# Altium PCB 48v-4v regulator.PcbDoc
Units mm, origin at the board's own origin, x right, y up, seen from the top; angles counter-clockwise.
Board outline 38.75 x 31.25 mm, 2 copper layers (Top Layer, Bottom Layer), stack 1.621 mm thick; 27 components, 13 nets, 69 pads, 87 vias.
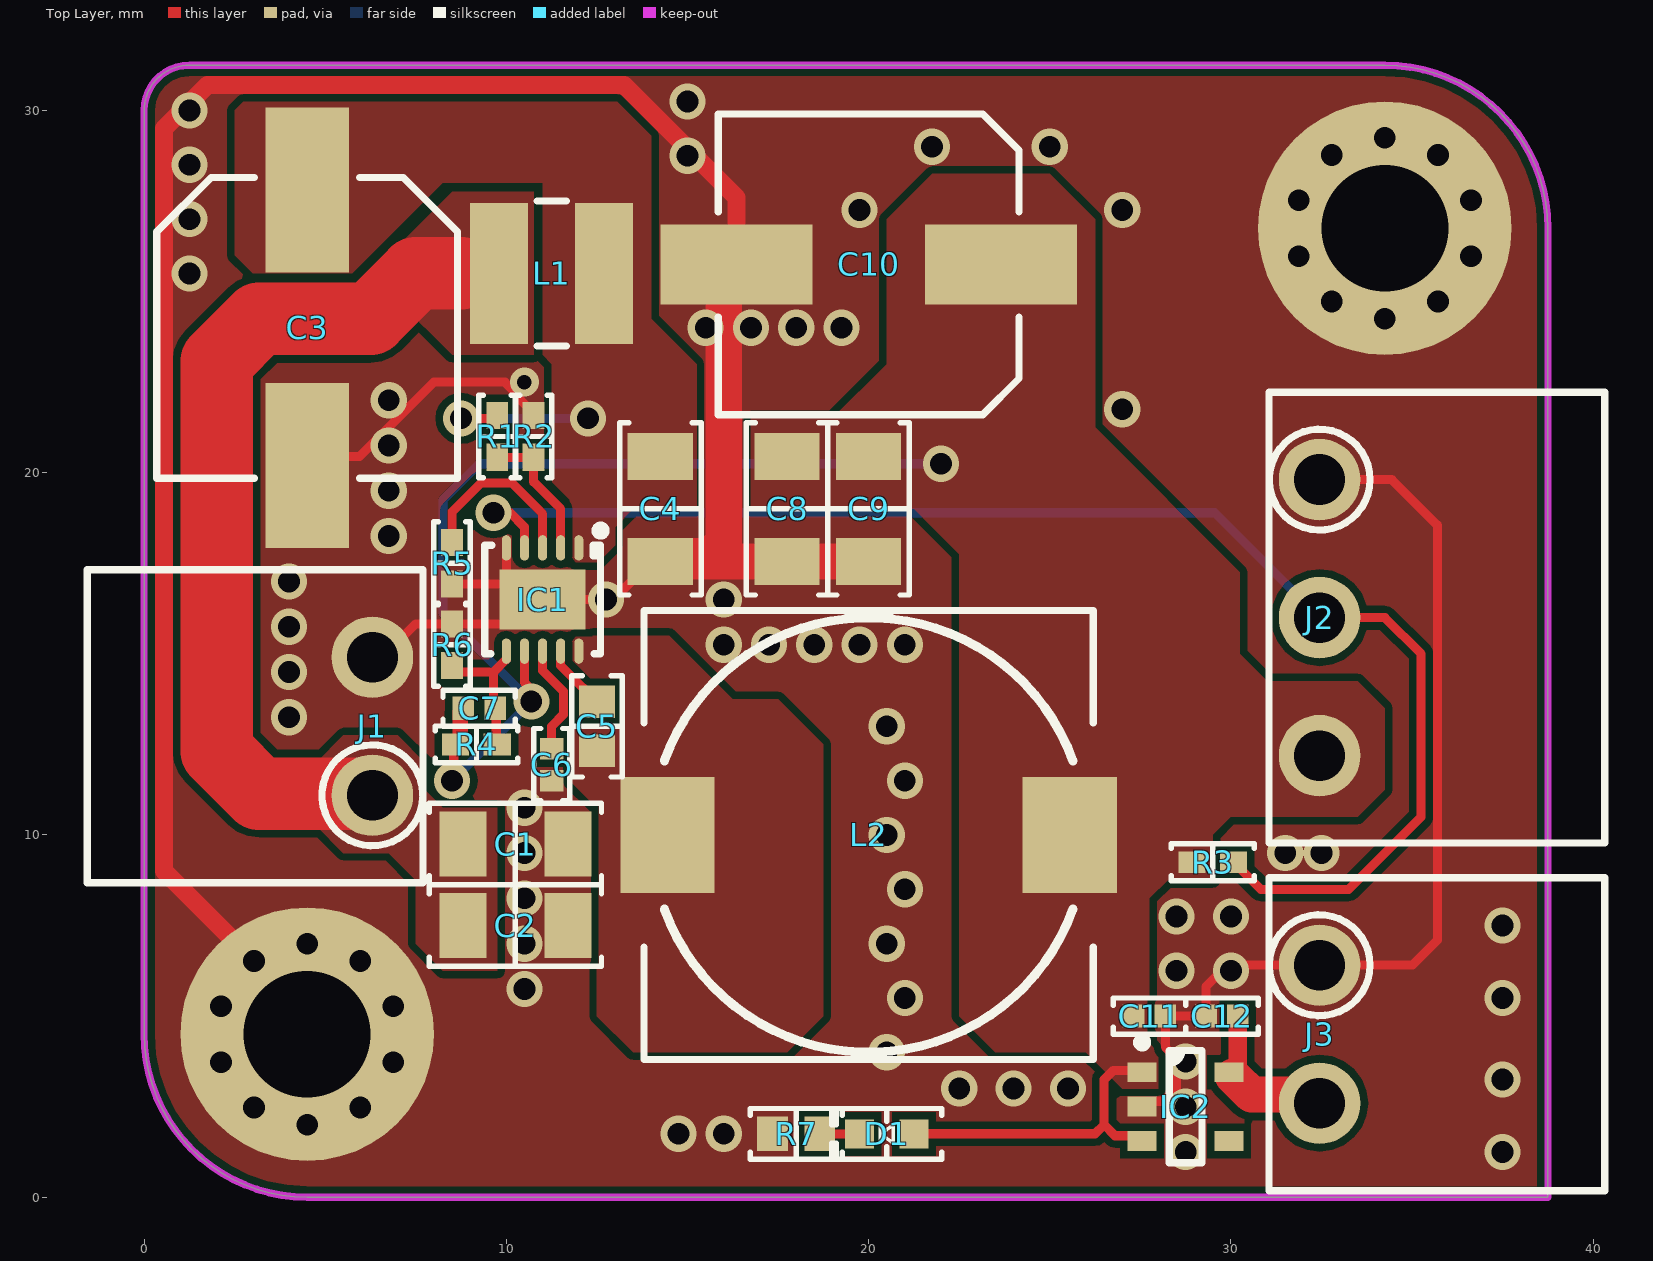
[diagram p0: Top Layer view]
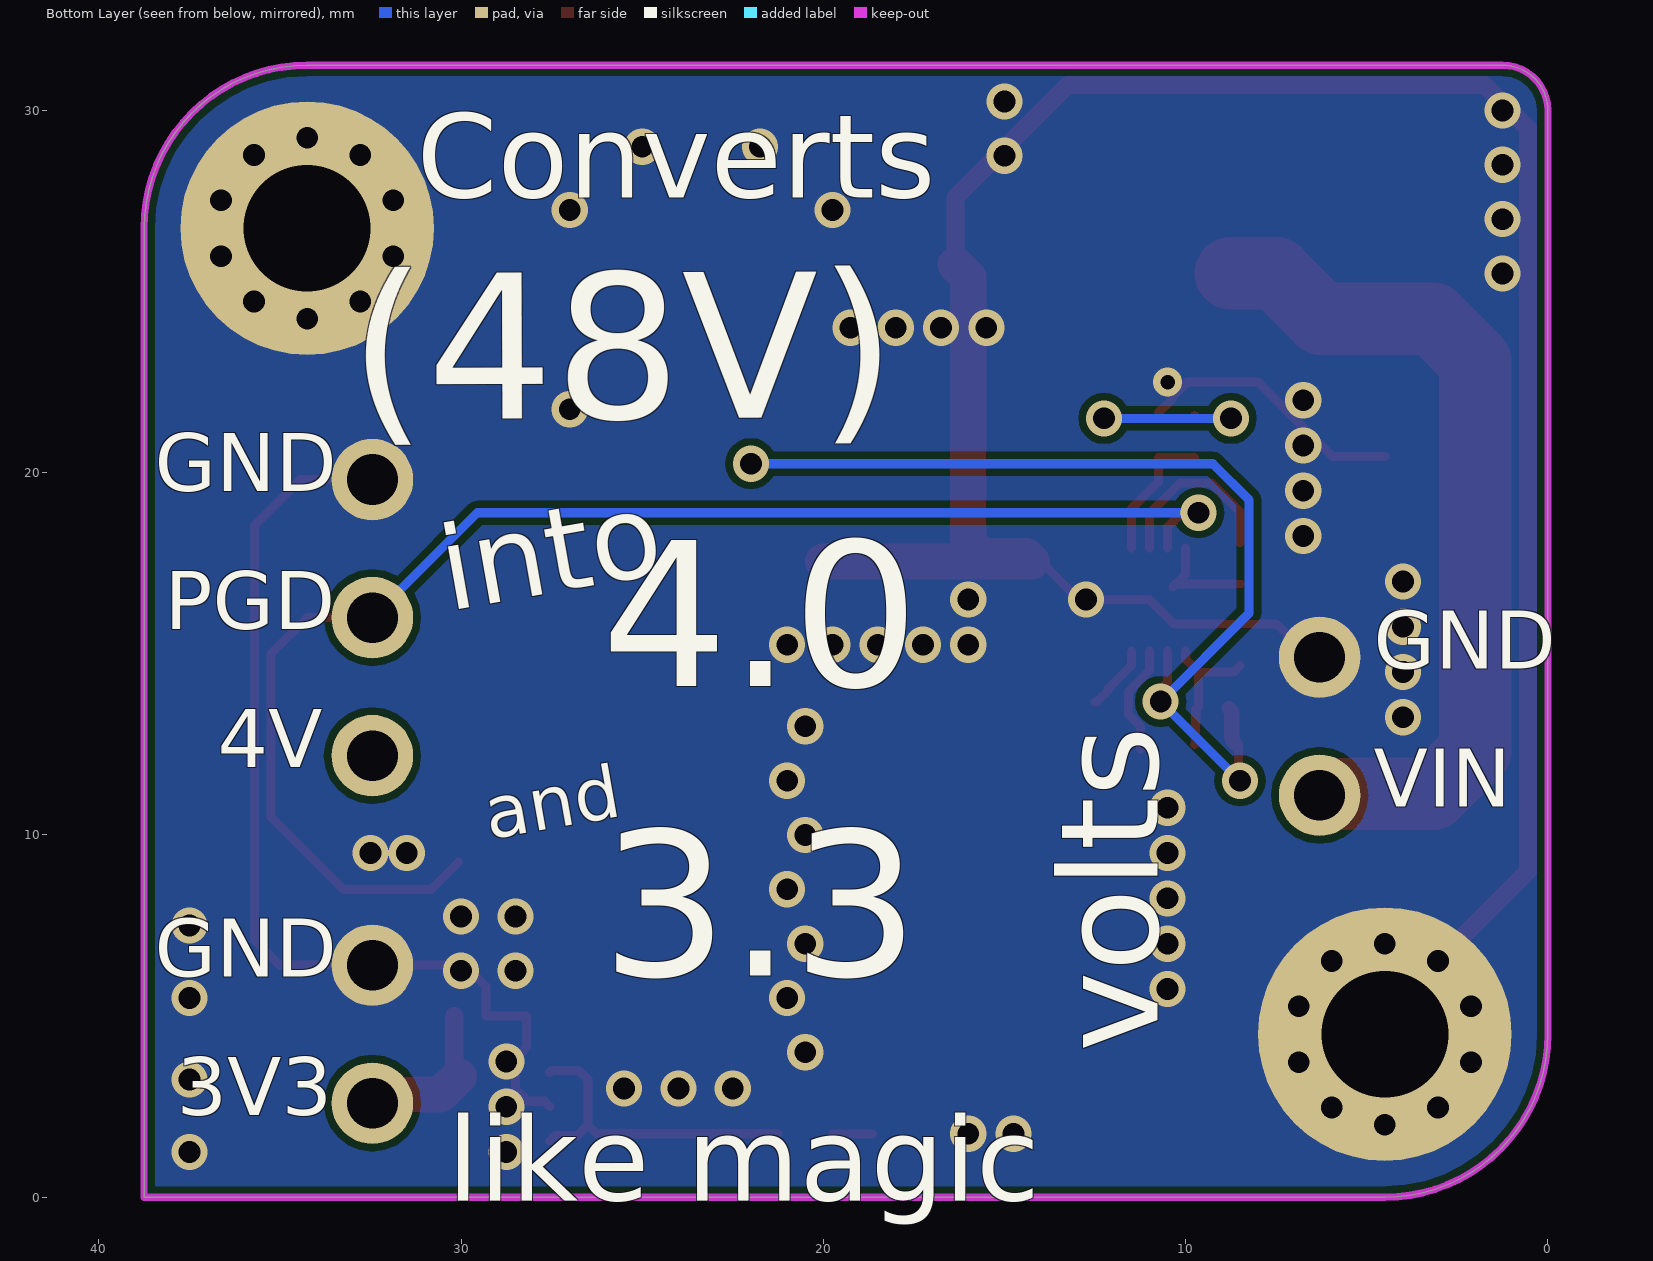
[diagram p1: Bottom Layer view, seen from below]

## Layer stack, top to bottom
Top Solder: solder mask 0.0102, Solder Resist, Dk 3.5
Top Layer: signal copper 0.0356
Dielectric1: core 1.55, FR-4, Dk 4.8
Bottom Layer: signal copper 0.0356
Bottom Solder: solder mask 0.0102, Solder Resist, Dk 3.5

## Board outline
0,4.5 ccw(c4.5,4.5) 4.5,0 38.75,0 38.75,26.75 ccw(c34.25,26.75) 34.25,31.25 1.25,31.25 ccw(c1.25,30) 0,30

## Design rules (kind name [scope] priority, off if disabled: settings)
Clearance PadClearance [IsPad vs IsPad] p1: gap=0.2 ignorepadtopadclearanceinfootprint=FALSE except(0: Arc-Hole Track-Hole SMDPad-Hole THPad-Hole Via-Hole Fill-Hole Poly-Hole Region-Hole Text-Hole)
Clearance [All] p2: gap=0.2 ignorepadtopadclearanceinfootprint=FALSE except(0: Arc-Hole Track-Hole SMDPad-Hole THPad-Hole Via-Hole Fill-Hole Poly-Hole Region-Hole Text-Hole)
HoleSize [All] p1: absolutevalues=TRUE maxlimit=6 minlimit=0.4 maxpercent=80.000 minpercent=20.000
HoleToHoleClearance [All] p1: gap=0.2 allowstackedmicrovias=TRUE
MinimumSolderMaskSliver [All] p1: minsoldermaskwidth=0
PolygonConnect ViaConnect [IsVia] p1: connectstyle=Direct reliefconductorwidth=0.254 reliefentries=4 polygonreliefangle="90 Angle" airgapwidth=0.254
PolygonConnect [All] p2: connectstyle=Direct reliefconductorwidth=0.3 reliefentries=4 polygonreliefangle="90 Angle" airgapwidth=0.254
RoutingVias [All] p1: holewidth=0.6 width=1 viastyle="Through Hole" minholewidth=0.4 minwidth=0.8 maxholewidth=5 maxwidth=6
SilkToSilkClearance [All] p1: silktosilkclearance=0
SilkToSolderMaskClearance SilkscreenOverComponentPads [IsPad] p1: minsilkscreentomaskgap=0.05 clearancetoexposedcopper=TRUE
SolderMaskExpansion "Via Tenting" [IsVia] p1: expansion=-2 istentingtop=FALSE
SolderMaskExpansion [All] p2: expansion=0.102 istentingtop=FALSE
Width [All] p1: maxlimit=2 minlimit=0.2 preferedwidth=0.4
25 further rules are at their usual default settings.

## Components (designator, comment, footprint, x,y, rotation, side; value= is the part's Value field where it differs from the comment)
C1 "2.2µF" "CAP 1206_3216 - 1.8MM" 10.25,9.75 r180 top
C2 "2.2µF" "CAP 1206_3216 - 1.8MM" 10.25,7.5 r180 top
C3 "33µF" "CAP ALSMD 8.3MM H10.5MM" 4.5,24 r270 top
C4 "2.2µF" "CAP 1206_3216 - 1.8MM" 14.25,19 r90 top
C5 "0.1µF" "CAP 0603_1608" 12.5,13 r270 top
C6 "1µF" "CAP 0402_1005" 11.25,11.94 r270 top
C7 "3300pF" "CAP 0402_1005" 9.25,13.5 r180 top
C8 "47µF" "CAP 1206_3216 - 1.8MM" 17.75,19 r90 top
C9 "47µF" "CAP 1206_3216 - 1.8MM" 20,19 r90 top
C10 "220µF" "CAP ALSMD POLY 8.3MM H6.7MM" 20,25.75 r180 top
C11 "1µF" "CAP 0402_1005" 27.75,5 r0 top
C12 "1µF" "CAP 0402_1005" 29.75,5 r180 top
D1 "Green" "LED 0603_1608 GREEN" 20.5,1.75 r180 top
IC1 "LT8619EDD#PBF" "ANALOG DFN-10 3x3MM DD" 11,16.5 r270 top
IC2 "AP2112K-3.3TRG1" "DIODES SOT-23-5 W5" 28.75,2.5 r0 top
J1 "OQ0232510000G" "FCI 06-381-2PIN" 3,13 r90 top
J2 "OQ0332510000G" "FCI 06-381-3PIN" 35.75,16 r270 top
J3 "OQ0232510000G" "FCI 06-381-2PIN" 35.75,4.5 r270 top
L1 "1.6µH" "TDK VLCF4024-2" 11.25,25.5 r0 top
L2 "22µH" "TDK SLF12555" 20,10 r0 top
R1 "1 MOhms" "RES 0402_1005" 9.75,21 r90 top
R2 "25.5 kOhms" "RES 0402_1005" 10.75,21 r270 top
R3 "100 kOhms" "RES 0402_1005" 29.5,9.25 r180 top
R4 "1 MOhms" "RES 0402_1005" 9.175,12.5 r180 top
R5 "34.8 kOhms" "RES 0402_1005" 8.5,17.5 r90 top
R6 "249 kOhms" "RES 0402_1005" 8.5,15.25 r270 top
R7 "200 Ohms" "RES 0603_1608" 18,1.75 r180 top

## Footprints (in the part's own frame and the unit in brackets; to place one, negate y for a bottom-side part, rotate by r counter-clockwise, add the part's x,y. Pads: shape width x height; smd on the part's side, far side on the other; paste and mask are expansions set on the pad)
"ANALOG DFN-10 3x3MM DD" [mm] "DFN, 10-Leads, Body 3.00x3.00mm, Pitch 0.50mm, Thermal Pad 1.65x2.38mm, IPC Medium Density"
  oval 0.7x0.25 smd: 1(-1.425,1) 2(-1.425,0.5) 3(-1.425,0) 4(-1.425,-0.5) 5(-1.425,-1) 6(1.425,-1) 7(1.425,-0.5) 8(1.425,0) 9(1.425,0.5) 10(1.425,1)
  rect 1.65x2.38 smd: 11(0,0)
  silkscreen extent -2.02,-1.6 1.5,1.73, body extent -1.5,-1.5 1.5,1.5, height 0.8
"CAP 0402_1005" [mm] "Chip Capacitor, 2-Leads, Body 1.02x0.51mm, IPC Medium Density"
  rect 0.6x0.64 smd: 1(-0.44,0) 2(0.44,0)
  silkscreen extent -1,-0.5 1,0.5, body extent -0.5,-0.26 0.5,0.26, height 0.52
"CAP 0603_1608" [mm] "Chip Capacitor, 2-Leads, Body 1.60x0.80mm, IPC Medium Density"
  rect 0.9x1 smd: 1(-0.675,0) 2(0.675,0)
  silkscreen extent -1.4,-0.7 1.4,0.7, body extent -0.8,-0.41 0.8,0.41, height 0.82
"CAP 1206_3216 - 1.8MM" [mm] "Chip Capacitor, 2-Leads, Body 3.25x1.60mm, IPC Medium Density"
  rect 1.3x1.8 smd: 1(-1.45,0) 2(1.45,0)
  silkscreen extent -2.37,-1.12 2.37,1.12, body extent -1.6,-0.8 1.6,0.8, height 1.8
"CAP ALSMD 8.3MM H10.5MM" [mm] "Aluminum Electrolytic Capacitor, Body 8.30x8.30x10.50mm, IPC Low Density"
  rect 4.55x2.3 smd: 1(-3.8,0) 2(3.8,0)
  silkscreen extent -4.15,-4.15 4.15,4.15, body extent -4.95,-4.15 4.95,4.15, height 10.5
"CAP ALSMD POLY 8.3MM H6.7MM" [mm] "Aluminum Electrolytic Capacitor, Body 8.30x8.30x6.7mm"
  rect 4.2x2.2 smd: 1(-3.65,0) 2(3.65,0)
  silkscreen extent -4.15,-4.15 4.15,4.15, body extent -4.5,-4.15 4.5,4.15, height 6.7
"DIODES SOT-23-5 W5" [mm] "SOT23, 5-Leads, Body 3.00x2.85mm, Pitch 0.95mm, IPC Medium Density"
  rect 0.8x0.55 smd: 1(-1.2,0.95) 2(-1.2,0) 3(-1.2,-0.95) 4(1.2,-0.95) 5(1.2,0.95)
  silkscreen extent -1.32,-1.55 0.45,1.9, body extent -1.41,-1.45 1.41,1.45, height 1.5
"FCI 06-381-2PIN" [mm] "FCI Pluggable Terminal Block"
  round 2.25 hole 1.4: 1(-1.905,-3.302) 2(1.905,-3.302)
  silkscreen extent -4.32,-4.7 4.32,4.57, body extent -4.4,-4.7 4.4,4.5, height 7.6
"FCI 06-381-3PIN" [mm] "FCI Pluggable Terminal Block"
  round 2.25 hole 1.4: 1(-3.81,-3.302) 2(0,-3.302) 3(3.81,-3.302)
  silkscreen extent -6.22,-4.7 6.22,4.57, body extent -6.31,-4.7 6.31,4.5, height 7.6
"LED 0603_1608 GREEN" [mm] "Chip Diode, 2-Leads, Body 1.60x0.80mm, IPC Medium Density"
  rect 0.8x0.8 smd: 1(-0.75,0) 2(0.75,0)
  silkscreen extent -1.52,-0.7 1.52,0.7, body extent -0.8,-0.4 0.8,0.4, height 0.53
"RES 0402_1005" [mm] "Chip Resistor, 2-Leads, Body 1.0x0.5mm, IPC Medium Density"
  rect 0.75x0.6 smd: 1(-0.575,0) 2(0.575,0)
  silkscreen extent -1.14,-0.51 1.14,0.51, body extent -0.5,-0.25 0.5,0.25, height 0.35
"RES 0603_1608" [mm] "Chip Resistor, 2-Leads, Body 1.60x0.80mm, IPC Medium Density"
  rect 0.85x0.95 smd: 1(-0.65,0) 2(0.65,0)
  silkscreen extent -1.27,-0.7 1.27,0.7, body extent -0.8,-0.4 0.8,0.4, height 0.45
"TDK SLF12555" [mm] "Precision Wire Wound Inductor, 2-Leads, Body 12.50x12.50mm, IPC Medium Density"
  rect 2.6x3.2 smd: 1(-5.55,0) 2(5.55,0)
  silkscreen extent -6.2,-6.2 6.2,6.2, body extent -6.33,-6.32 6.34,6.33, height 5.53
"TDK VLCF4024-2" [mm] "Precision Wire Wound Inductor, 2-Leads, Body 4.00x4.00mm, IPC Medium Density"
  rect 1.6x3.9 smd: 1(-1.45,0) 2(1.45,0)
  silkscreen extent -0.4,-2 0.4,2, body extent -2.05,-2 2.05,2, height 2.4

## Part data
C1 C2 C4: library part 12061C225KAT2A, "CAP CER 2.2UF 100V X7R 1206", Device Package="1206 (3216 Metric)", Manufacturer="AVX Corporation", Operating Temperature="-55°C ~ 125°C", Supplier Part Number 1=478-10860-2-ND, Temperature Coefficient=X7R, Tolerance=±10%, Voltage - Rated=100V, Applications="General Purpose", Capacitance=2.2µF, ComponentLink1Description=Datasheet, ComponentLink1URL=http://datasheets.avx.com/X7RDielectric.pdf, ComponentLink2Description="DigiKey Link", ComponentLink2URL=//digikey.com/product-detail/en/avx-corporation/12061C225KAT2A/478-10860-2-ND/3081499, LastUpdated="29/11/2019 21:36:25", Lifecycle Status=0, Minimum Order=1, Mounting Type="Surface Mount, MLCC", Package / Case="1206 (3216 Metric)", Packaging=TapeAndReel, Part Number=12061C225KAT2A, Part Status=Active, PartId=22821, Price=0.13, Series=-, Size / Dimension="0.126\" L x 0.063\" W (3.20mm x 1.60mm)", Supplier 1=DigiKey, Thickness (Max)="0.071\" (1.80mm)"
C3: library part EEH-ZA1J330P, "CAP ALUM POLY HYB 33UF 63V SMD", Device Package="Radial, Can - SMD", ESR (Equivalent Series Resistance)=40mOhm, Lifetime @ Temp.="10000 Hrs @ 105°C", Manufacturer="Panasonic Electronic Components", Operating Temperature="-55°C ~ 105°C", Ratings=AEC-Q200, Ripple Current @ High Frequency="1.7A @ 100kHz", Ripple Current @ Low Frequency="170mA @ 100Hz", Supplier Part Number 1=P15448TR-ND, Tolerance=±20%, Voltage - Rated=63V, Applications=Automotive, Capacitance=33µF, ComponentLink1Description=Datasheet, ComponentLink1URL=https://industrial.panasonic.com/cdbs/www-data/pdf/RDD0000/ABA0000C1221.pdf, ComponentLink2Description="DigiKey Link", ComponentLink2URL=//digikey.com/product-detail/en/panasonic-electronic-components/EEH-ZA1J330P/P15448TR-ND/3088131, Height - Seated (Max)="0.413\" (10.50mm)", LastUpdated="22/12/2019 06:14:41", Lifecycle Status=0, Minimum Order=1, Mounting Type="Surface Mount", Package / Case="Radial, Can - SMD", Packaging=TapeAndReel, Part Number=EEH-ZA1J330P, Part Status=Active, PartId=2088, Price=1.05, Series=ZA, Size / Dimension="0.315\" Dia (8.00mm)", Supplier 1=DigiKey, Surface Mount Land Size="0.327\" L x 0.327\" W (8.30mm x 8.30mm)", Type=Hybrid
C5: library part HMK107B7104MA-T, "CAP CER 0.1UF 100V X7R 0603", Device Package="0603 (1608 Metric)", Manufacturer="Taiyo Yuden", Operating Temperature="-55°C ~ 125°C", Supplier Part Number 1=587-6323-2-ND, Temperature Coefficient=X7R, Tolerance=±20%, Voltage - Rated=100V, Applications="General Purpose", Capacitance=0.1µF, ComponentLink1Description=Datasheet, ComponentLink1URL="https://ds.yuden.co.jp/TYCOMPAS/ut/detail?pn=HMK107B7104MA-T &u=M", ComponentLink2Description="DigiKey Link", ComponentLink2URL=//digikey.com/product-detail/en/taiyo-yuden/HMK107B7104MA-T/587-6323-2-ND/5810933, Features="High Voltage", LastUpdated="29/11/2019 20:59:48", Lifecycle Status=0, Minimum Order=1, Mounting Type="Surface Mount, MLCC", Package / Case="0603 (1608 Metric)", Packaging=TapeAndReel, Part Number=HMK107B7104MA-T, Part Status=Active, PartId=4530, Price=0.02, Series=M, Size / Dimension="0.063\" L x 0.031\" W (1.60mm x 0.80mm)", Supplier 1=DigiKey, Thickness (Max)="0.035\" (0.90mm)"
C6 C11 C12: library part LMK105C6105MV-F, "CAP CER 1UF 10V X6S 0402", Device Package="0402 (1005 Metric)", Manufacturer="Taiyo Yuden", Operating Temperature="-55°C ~ 105°C", Supplier Part Number 1=587-5462-2-ND, Temperature Coefficient=X6S, Tolerance=±20%, Voltage - Rated=10V, Applications="SMPS Filtering", Capacitance=1µF, ComponentLink1Description=Datasheet, ComponentLink1URL="https://ds.yuden.co.jp/TYCOMPAS/ut/detail?pn=LMK105C6105MV-F &u=M", ComponentLink2Description="DigiKey Link", ComponentLink2URL=//digikey.com/product-detail/en/taiyo-yuden/LMK105C6105MV-F/587-5462-2-ND/7067047, LastUpdated="29/11/2019 20:59:56", Lifecycle Status=0, Minimum Order=1, Mounting Type="Surface Mount, MLCC", Package / Case="0402 (1005 Metric)", Packaging=TapeAndReel, Part Number=LMK105C6105MV-F, Part Status=Active, PartId=9523, Price=0.01, Series=M, Size / Dimension="0.039\" L x 0.020\" W (1.00mm x 0.50mm)", Supplier 1=DigiKey, Thickness (Max)="0.022\" (0.55mm)"
C7: library part CC0402KRX7R9BB332, "CAP CER 3300PF 50V X7R 0402", Device Package="0402 (1005 Metric)", Manufacturer=Yageo, Operating Temperature="-55°C ~ 125°C", Supplier Part Number 1=311-1034-2-ND, Temperature Coefficient=X7R, Tolerance=±10%, Voltage - Rated=50V, Applications="General Purpose", Capacitance=3300pF, ComponentLink1Description=Datasheet, ComponentLink1URL=https://www.yageo.com/upload/media/product/productsearch/datasheet/mlcc/UPY-GPHC_X7R_6.3V-to-50V_18.pdf, ComponentLink2Description="DigiKey Link", ComponentLink2URL=//digikey.com/product-detail/en/yageo/CC0402KRX7R9BB332/311-1034-2-ND/302768, LastUpdated="29/11/2019 20:59:48", Lifecycle Status=0, Minimum Order=1, Mounting Type="Surface Mount, MLCC", Package / Case="0402 (1005 Metric)", Packaging=TapeAndReel, Part Number=CC0402KRX7R9BB332, Part Status=Active, PartId=4849, Price=0.00, Series=CC, Size / Dimension="0.039\" L x 0.020\" W (1.00mm x 0.50mm)", Supplier 1=DigiKey, Thickness (Max)="0.022\" (0.55mm)"
C8 C9: library part LMK316BJ476ML-T, "CAP CER 47UF 10V X5R 1206", Device Package="1206 (3216 Metric)", Manufacturer="Taiyo Yuden", Operating Temperature="-55°C ~ 85°C", Supplier Part Number 1=587-1780-2-ND, Temperature Coefficient=X5R, Tolerance=±20%, Voltage - Rated=10V, Applications="General Purpose", Capacitance=47µF, ComponentLink1Description=Datasheet, ComponentLink1URL=https://www.yuden.co.jp/productdata/catalog/mlcc01_e.pdf, ComponentLink2Description="DigiKey Link", ComponentLink2URL=//digikey.com/product-detail/en/taiyo-yuden/LMK316BJ476ML-T/587-1780-2-ND/1212780, LastUpdated="29/11/2019 21:36:20", Lifecycle Status=0, Minimum Order=1, Mounting Type="Surface Mount, MLCC", Package / Case="1206 (3216 Metric)", Packaging=TapeAndReel, Part Number=LMK316BJ476ML-T, Part Status=Active, PartId=22184, Price=0.15, Series=M, Size / Dimension="0.126\" L x 0.063\" W (3.20mm x 1.60mm)", Supplier 1=DigiKey, Thickness (Max)="0.071\" (1.80mm)"
C10: library part APXA6R3ARA221MH70G, "CAP ALUM POLY 220UF 20% 6.3V SMD", Device Package="Radial, Can - SMD", ESR (Equivalent Series Resistance)=25mOhm, Lifetime @ Temp.="15000 Hrs @ 105°C", Manufacturer="United Chemi-Con", Operating Temperature="-55°C ~ 105°C", Ripple Current @ High Frequency="3.02A @ 100kHz", Supplier Part Number 1=565-3114-2-ND, Tolerance=±20%, Voltage - Rated=6.3V, Applications="General Purpose", Capacitance=220µF, ComponentLink1Description=Datasheet, ComponentLink1URL=http://www.chemi-con.co.jp/cgi-bin/CAT_DB/SEARCH/cat_db_al.cgi?e=e&j=p&pdfname=pxa, ComponentLink2Description="DigiKey Link", ComponentLink2URL=//digikey.com/product-detail/en/united-chemi-con/APXA6R3ARA221MH70G/565-3114-2-ND/758544, Height - Seated (Max)="0.264\" (6.70mm)", LastUpdated="22/12/2019 07:43:13", Lifecycle Status=0, Minimum Order=1, Mounting Type="Surface Mount", Package / Case="Radial, Can - SMD", Packaging=TapeAndReel, Part Number=APXA6R3ARA221MH70G, Part Status=Active, PartId=2343, Price=0.58, Series=NPCAP™-PXA, Size / Dimension="0.315\" Dia (8.00mm)", Supplier 1=DigiKey, Surface Mount Land Size="0.327\" L x 0.327\" W (8.30mm x 8.30mm)", Type=Polymer
D1: library part LTST-C191KGKT, "LED GREEN CLEAR SMD", Current - Test=20mA, Device Package="0603 (1608 Metric)", Lens Color=Colorless, Manufacturer="Lite-On Inc.", Millicandela Rating=35mcd, Supplier Part Number 1=160-1446-2-ND, Voltage - Forward (Vf) (Typ)=2V, Color=Green, ComponentLink1Description=Datasheet, ComponentLink1URL=http://optoelectronics.liteon.com/upload/download/DS22-2000-228/LTST-C191KGKT.PDF, ComponentLink2Description="DigiKey Link", ComponentLink2URL=//digikey.com/product-detail/en/lite-on-inc/LTST-C191KGKT/160-1446-2-ND/386835, Configuration=Standard, Height (Max)=0.65mm, LastUpdated="01/12/2019 14:50:11", Lens Size="1.10mm x 0.80mm", Lens Style="Rectangle with Flat Top", Lens Transparency=Clear, Lifecycle Status=0, Minimum Order=1, Mounting Type="Surface Mount", Package / Case="0603 (1608 Metric)", Packaging=TapeAndReel, Part Number=LTST-C191KGKT, Part Status=Active, PartId=655, Price=0.04, Series=-, Size / Dimension="1.60mm L x 0.80mm W", Supplier 1=DigiKey, Viewing Angle=130°, Wavelength - Dominant=571nm, Wavelength - Peak=574nm
IC1: "IC REG BUCK 0.8V 1.2A 10DFN", Current - Output=1.2A, Device Package="10-WFDFN Exposed Pad", Frequency - Switching="300kHz ~ 2.2MHz", Manufacturer="Linear Technology/Analog Devices", Operating Temperature="0°C ~ 125°C (TJ)", Supplier Device Package="10-DFN (3x3)", Supplier Part Number 1=LT8619EDD#PBF-ND, Voltage - Input (Max)=60V, Voltage - Input (Min)=3V, Voltage - Output (Max)=59.4V, Voltage - Output (Min/Fixed)=0.8V, ComponentLink1Description=Datasheet, ComponentLink1URL=http://www.analog.com/media/en/technical-documentation/data-sheets/LT8619-8619-5.pdf, ComponentLink2Description="DigiKey Link", ComponentLink2URL=//digikey.com/product-detail/en/linear-technology-analog-devices/LT8619EDD-PBF/LT8619EDD-PBF-ND/8275876, Function=Step-Down, LastUpdated="22/12/2019 05:56:33", Lifecycle Status=0, Minimum Order=1, Mounting Type="Surface Mount", Number of Outputs=1, Output Configuration=Positive, Output Type=Fixed, Package / Case="10-WFDFN Exposed Pad", Packaging=Tube, Part Number=LT8619EDD#PBF, Part Status=Active, Price=6.43, Series=-, Supplier 1=DigiKey, Synchronous Rectifier=Yes, Topology=Buck
IC2: "IC REG LINEAR 3.3V 600MA SOT25", Current - Output=600mA, Current - Quiescent (Iq)=80µA, Device Package="SC-74A, SOT-753", Manufacturer="Diodes Incorporated", Operating Temperature="-40°C ~ 85°C", Supplier Device Package=SOT-25, Supplier Part Number 1=AP2112K-3.3TRG1DITR-ND, Voltage - Input (Max)=6V, Voltage - Output (Min/Fixed)=3.3V, Voltage Dropout (Max)="0.4V @ 600mA", ComponentLink1Description=Datasheet, ComponentLink1URL=https://www.diodes.com/assets/Datasheets/AP2112.pdf, ComponentLink2Description="DigiKey Link", ComponentLink2URL=//digikey.com/product-detail/en/diodes-incorporated/AP2112K-3.3TRG1/AP2112K-3.3TRG1DITR-ND/4470746, Control Features=Enable, LastUpdated="22/12/2019 09:57:18", Lifecycle Status=0, Minimum Order=1, Mounting Type="Surface Mount", Number of Regulators=1, Output Configuration=Positive, Output Type=Fixed, Package / Case="SC-74A, SOT-753", Packaging=TapeAndReel, Part Number=AP2112K-3.3TRG1, Part Status=Active, Price=0.10, Protection Features="Over Current, Over Temperature", PSRR="65sB (100Hz ~ 1KHz)", Series=-, Supplier 1=DigiKey
J1 J3: "TERM BLOCK HDR 2POS 90DEG 3.81MM", Color=Green, Current - UL=10A, Manufacturer="Amphenol Anytek", Operating Temperature="-40°C ~ 115°C", Supplier Part Number 1=609-3819-ND, Voltage - UL=300V, ComponentLink1Description=Datasheet, ComponentLink1URL=http://portal.fciconnect.com/Comergent//fci/drawing/oqxx32x100j0g.pdf, ComponentLink2Description="DigiKey Link", ComponentLink2URL=//digikey.com/product-detail/en/amphenol-anytek/OQ0232510000G/609-3819-ND/2261255, Contact Mating Finish=Tin, Header Orientation="90°, Right Angle", LastUpdated="16/12/2019 19:14:30", Lifecycle Status=0, Minimum Order=1, Mounting Type="Through Hole", Number of Levels=1, Number of Positions=2, Packaging=Bulk, Part Number=OQ0232510000G, Part Status=Active, Pitch="0.150\" (3.81mm)", Positions Per Level=2, Price=0.49, Series=06-381, Supplier 1=DigiKey, Termination Style=Solder, Type="Header, Male Pins, Shrouded (4 Side)"
J2: "TERM BLOCK HDR 3POS 90DEG 3.81MM", Color=Green, Current - UL=10A, Manufacturer="Amphenol Anytek", Operating Temperature="-40°C ~ 115°C", Supplier Part Number 1=609-3820-ND, Voltage - UL=300V, ComponentLink1Description=Datasheet, ComponentLink1URL=http://portal.fciconnect.com/Comergent//fci/drawing/oqxx32x100j0g.pdf, ComponentLink2Description="DigiKey Link", ComponentLink2URL=//digikey.com/product-detail/en/amphenol-anytek/OQ0332510000G/609-3820-ND/2261261, Contact Mating Finish=Tin, Header Orientation="90°, Right Angle", LastUpdated="16/12/2019 19:14:46", Lifecycle Status=0, Minimum Order=1, Mounting Type="Through Hole", Number of Levels=1, Number of Positions=3, Packaging=Bulk, Part Number=OQ0332510000G, Part Status=Active, Pitch="0.150\" (3.81mm)", Positions Per Level=3, Price=0.53, Series=06-381, Supplier 1=DigiKey, Termination Style=Solder, Type="Header, Male Pins, Shrouded (4 Side)"
L1: library part VLCF4024T-1R6N2R1-2, "FIXED IND 1.6UH 2.1A 39 MOHM SMD", Current - Saturation=2.1A, DC Resistance (DCR)="39mOhm Max", Device Package=Nonstandard, Inductance Frequency - Test=100kHz, Manufacturer="TDK Corporation", Operating Temperature="-40°C ~ 105°C", Supplier Part Number 1=445-8731-2-ND, Tolerance=±30%, ComponentLink1Description=Datasheet, ComponentLink1URL=https://product.tdk.com/info/en/catalog/datasheets/inductor_commercial_power_vlcf4024-2_en.pdf?ref_disty=digikey, ComponentLink2Description="DigiKey Link", ComponentLink2URL=//digikey.com/product-detail/en/tdk-corporation/VLCF4024T-1R6N2R1-2/445-8731-2-ND/3083276, Current Rating (Amps)=2.1A, Height - Seated (Max)="0.094\" (2.40mm)", Inductance=1.6µH, LastUpdated="02/12/2019 13:29:53", Lifecycle Status=0, Material - Core=Ferrite, Minimum Order=1, Mounting Type="Surface Mount", Package / Case=Nonstandard, Packaging=TapeAndReel, Part Number=VLCF4024T-1R6N2R1-2, Part Status=Active, PartId=156, Price=0.44, Series=VLCF, Shielding=Shielded, Size / Dimension="0.157\" L x 0.157\" W (4.00mm x 4.00mm)", Supplier 1=DigiKey, Type=Wirewound
L2: library part SLF12555T-220M2R3-PF, "FIXED IND 22UH 2.3A 33.8 MOHM", Current - Saturation=2.3A, Current Rating (Amps)=3.4A, DC Resistance (DCR)=33.8mOhm, Device Package=Nonstandard, Inductance Frequency - Test=1kHz, Manufacturer="TDK Corporation", Operating Temperature="-40°C ~ 105°C", Supplier Part Number 1=445-174225-1-ND, Tolerance=±20%, ComponentLink1Description=Datasheet, ComponentLink1URL=https://product.tdk.com/info/en/catalog/datasheets/inductor_commercial_power_slf12555_en.pdf?ref_disty=digikey, ComponentLink2Description="DigiKey Link", ComponentLink2URL=http://digikey.com/product-detail/en/tdk-corporation/SLF12555T-220M2R3-PF/445-174225-1-ND/5823095, Height - Seated (Max)="0.228\" (5.80mm)", Inductance=22µH, LastUpdated="02/01/2020 00:15:33", Lifecycle Status=Active, Material - Core=Ferrite, Minimum Order=1, Mounting Type="Surface Mount", Package / Case=Nonstandard, Packaging=ReReel, Part Number=SLF12555T-220M2R3-PF, Part Status=Active, PartId=110, Price=0.00, Series=SLF, Shielding=Shielded, Size / Dimension="0.492\" L x 0.492\" W (12.50mm x 12.50mm)", Supplier 1=DigiKey, Type=Wirewound
R1 R4: library part ERJ-2RKF1004X, "RES SMD 1M OHM 1% 1/10W 0402", Device Package="0402 (1005 Metric)", Manufacturer="Panasonic Electronic Components", Operating Temperature="-55°C ~ 155°C", Power (Watts)="0.1W, 1/10W", Ratings=AEC-Q200, Supplier Device Package=0402, Supplier Part Number 1=P1.00MLTR-ND, Temperature Coefficient=±100ppm/°C, Tolerance=±1%, ComponentLink1Description=Datasheet, ComponentLink1URL=https://industrial.panasonic.com/cdbs/www-data/pdf/RDA0000/AOA0000C304.pdf, ComponentLink2Description="DigiKey Link", ComponentLink2URL=//digikey.com/product-detail/en/panasonic-electronic-components/ERJ-2RKF1004X/P1.00MLTR-ND/79728, Composition="Thick Film", Features="Automotive AEC-Q200", Height - Seated (Max)="0.016\" (0.40mm)", LastUpdated="29/11/2019 21:01:28", Lifecycle Status=0, Minimum Order=1, Number of Terminations=2, Package / Case="0402 (1005 Metric)", Packaging=TapeAndReel, Part Number=ERJ-2RKF1004X, Part Status=Active, PartId=19614, Price=0.00, Resistance="1 MOhms", Series=ERJ, Size / Dimension="0.039\" L x 0.020\" W (1.00mm x 0.50mm)", Supplier 1=DigiKey
R2: library part ERJ-2RKF2552X, "RES SMD 25.5K OHM 1% 1/10W 0402", Device Package="0402 (1005 Metric)", Manufacturer="Panasonic Electronic Components", Operating Temperature="-55°C ~ 155°C", Power (Watts)="0.1W, 1/10W", Ratings=AEC-Q200, Supplier Device Package=0402, Supplier Part Number 1=P25.5KLTR-ND, Temperature Coefficient=±100ppm/°C, Tolerance=±1%, ComponentLink1Description=Datasheet, ComponentLink1URL=https://industrial.panasonic.com/cdbs/www-data/pdf/RDA0000/AOA0000C304.pdf, ComponentLink2Description="DigiKey Link", ComponentLink2URL=//digikey.com/product-detail/en/panasonic-electronic-components/ERJ-2RKF2552X/P25.5KLTR-ND/192251, Composition="Thick Film", Features="Automotive AEC-Q200", Height - Seated (Max)="0.016\" (0.40mm)", LastUpdated="29/11/2019 21:01:33", Lifecycle Status=0, Minimum Order=1, Number of Terminations=2, Package / Case="0402 (1005 Metric)", Packaging=TapeAndReel, Part Number=ERJ-2RKF2552X, Part Status=Active, PartId=21268, Price=0.00, Resistance="25.5 kOhms", Series=ERJ, Size / Dimension="0.039\" L x 0.020\" W (1.00mm x 0.50mm)", Supplier 1=DigiKey
R3: library part CRG0402F100K, "RES SMD 100K OHM 1% 1/16W 0402", Device Package="0402 (1005 Metric)", Manufacturer="TE Connectivity Passive Product", Operating Temperature="-55°C ~ 155°C", Power (Watts)="0.063W, 1/16W", Supplier Device Package=0402, Supplier Part Number 1=A121526TR-ND, Temperature Coefficient=±100ppm/°C, Tolerance=±1%, ComponentLink1Description=Datasheet, ComponentLink1URL=https://www.te.com/commerce/DocumentDelivery/DDEController?Action=srchrtrv&DocNm=1773204&DocType=DS&DocLang=English, ComponentLink2Description="DigiKey Link", ComponentLink2URL=//digikey.com/product-detail/en/te-connectivity-passive-product/CRG0402F100K/A121526TR-ND/2390483, Composition="Thick Film", Height - Seated (Max)="0.016\" (0.40mm)", LastUpdated="29/11/2019 21:01:32", Lifecycle Status=0, Minimum Order=1, Number of Terminations=2, Package / Case="0402 (1005 Metric)", Packaging=TapeAndReel, Part Number=CRG0402F100K, Part Status=Active, PartId=20715, Price=0.00, Resistance="100 kOhms", Series="CRG, Neohm", Size / Dimension="0.039\" L x 0.020\" W (1.00mm x 0.50mm)", Supplier 1=DigiKey
R5: library part ERJ-2RKF3482X, "RES SMD 34.8K OHM 1% 1/10W 0402", Device Package="0402 (1005 Metric)", Manufacturer="Panasonic Electronic Components", Operating Temperature="-55°C ~ 155°C", Power (Watts)="0.1W, 1/10W", Ratings=AEC-Q200, Supplier Device Package=0402, Supplier Part Number 1=P34.8KLTR-ND, Temperature Coefficient=±100ppm/°C, Tolerance=±1%, ComponentLink1Description=Datasheet, ComponentLink1URL=https://industrial.panasonic.com/cdbs/www-data/pdf/RDA0000/AOA0000C304.pdf, ComponentLink2Description="DigiKey Link", ComponentLink2URL=//digikey.com/product-detail/en/panasonic-electronic-components/ERJ-2RKF3482X/P34.8KLTR-ND/192312, Composition="Thick Film", Features="Automotive AEC-Q200", Height - Seated (Max)="0.016\" (0.40mm)", LastUpdated="29/11/2019 21:00:35", Lifecycle Status=0, Minimum Order=1, Number of Terminations=2, Package / Case="0402 (1005 Metric)", Packaging=TapeAndReel, Part Number=ERJ-2RKF3482X, Part Status=Active, PartId=3767, Price=0.00, Resistance="34.8 kOhms", Series=ERJ, Size / Dimension="0.039\" L x 0.020\" W (1.00mm x 0.50mm)", Supplier 1=DigiKey
R6: library part ERJ-2RKF2493X, "RES SMD 249K OHM 1% 1/10W 0402", Device Package="0402 (1005 Metric)", Manufacturer="Panasonic Electronic Components", Operating Temperature="-55°C ~ 155°C", Power (Watts)="0.1W, 1/10W", Ratings=AEC-Q200, Supplier Device Package=0402, Supplier Part Number 1=P249KLTR-ND, Temperature Coefficient=±100ppm/°C, Tolerance=±1%, ComponentLink1Description=Datasheet, ComponentLink1URL=https://industrial.panasonic.com/cdbs/www-data/pdf/RDA0000/AOA0000C304.pdf, ComponentLink2Description="DigiKey Link", ComponentLink2URL=//digikey.com/product-detail/en/panasonic-electronic-components/ERJ-2RKF2493X/P249KLTR-ND/192249, Composition="Thick Film", Features="Automotive AEC-Q200", Height - Seated (Max)="0.016\" (0.40mm)", LastUpdated="29/11/2019 21:01:34", Lifecycle Status=0, Minimum Order=1, Number of Terminations=2, Package / Case="0402 (1005 Metric)", Packaging=TapeAndReel, Part Number=ERJ-2RKF2493X, Part Status=Active, PartId=21288, Price=0.00, Resistance="249 kOhms", Series=ERJ, Size / Dimension="0.039\" L x 0.020\" W (1.00mm x 0.50mm)", Supplier 1=DigiKey
R7: library part ERJ-3GEYJ201V, "RES SMD 200 OHM 5% 1/10W 0603", Device Package="0603 (1608 Metric)", Manufacturer="Panasonic Electronic Components", Operating Temperature="-55°C ~ 155°C", Power (Watts)="0.1W, 1/10W", Ratings=AEC-Q200, Supplier Device Package=0603, Supplier Part Number 1=P200GTR-ND, Temperature Coefficient=±200ppm/°C, Tolerance=±5%, ComponentLink1Description=Datasheet, ComponentLink1URL=http://industrial.panasonic.com/www-cgi/jvcr13pz.cgi?E+PZ+3+AOA0001+ERJ3GEYJ201V+7+WW, ComponentLink2Description="DigiKey Link", ComponentLink2URL=//digikey.com/product-detail/en/panasonic-electronic-components/ERJ-3GEYJ201V/P200GTR-ND/135708, Composition="Thick Film", Features="Automotive AEC-Q200", Height - Seated (Max)="0.022\" (0.55mm)", LastUpdated="29/11/2019 21:01:23", Lifecycle Status=0, Minimum Order=1, Number of Terminations=2, Package / Case="0603 (1608 Metric)", Packaging=TapeAndReel, Part Number=ERJ-3GEYJ201V, Part Status=Active, PartId=18352, Price=0.00, Resistance="200 Ohms", Series=ERJ, Size / Dimension="0.063\" L x 0.031\" W (1.60mm x 0.80mm)", Supplier 1=DigiKey

## Free pads (board coordinates)
  round 7 hole 3.5: M(4.5,4.5) M(34.25,26.75)

## Via types
v1: diameter 1, hole 0.6, Top Layer to Bottom Layer, 86 vias
v2: diameter 0.8, hole 0.4, Top Layer to Bottom Layer, 1 vias

## Nets (pads, with @x,y where several pads share a name; then routed paths per layer and width w, separated by ;. In a path a pad name is that pad's centre, name@x,y a point inside that pad or via, vN(x,y) a via of type N, cw(c..) or ccw(c..) an arc to the next point about the centre after c; other vN are vias at no path point)
3V3: C12.1 IC2.5 J3.2 | length 4.4
  Top Layer w0.5: IC2.5@30.066,3.334 30.19,3.458 C12.1
  Top Layer w1: IC2.5@30.066,3.334 30.566,2.834 32.209,2.834 J3.2
4V: C7.2 C8.2 C9.2 C10.1 C11.1 D1.1 IC1.7 IC2.1 IC2.3 J2.3 L2.2 R3.2 R4.2 | length 37.6
  Top Layer w0.25: IC1.7 10.5,14.203 10.75,13.953 10.75,13.75 10.69,13.69 v1(10.69,13.682)
  Top Layer w0.254: v1(8.5,11.5) 8.55,11.55 8.55,12.45 R4.2 8.61,12.5 8.637,12.5 8.81,12.673 C7.2 ; D1.1 26.25,1.75 26.5,2 ; IC2.3 27.402,1.698 26.802,1.698 26.5,2 ; IC2.1 27.5,3.5 26.75,3.5 26.5,3.25 26.5,2
  Top Layer w0.4: R4.2@8.61,12.5 8.71,12.6 8.71,13.4 C7.2
  Bottom Layer w0.254: v1(8.5,11.5) 8.504,11.5 10.686,13.682 v1(10.69,13.682) 8.25,16.122 8.25,19.25 9.25,20.25 v1(22,20.25)
4VPGOOD: IC1.4 J2.2 R3.1 | length 39.6
  Top Layer w0.25: v1(9.645,18.895) 9.647,18.896 10.104,18.896 10.5,18.5 IC1.4 ; R3.1 30.825,8.5 33.25,8.5 35.25,10.5 35.25,15 34.25,16 J2.2
  Bottom Layer w0.25: v1(9.645,18.895) 29.553,18.895 J2.2
GND: C1.1 C2.1 C3.2 C4.1 C6.2 C8.1 C9.1 C10.2 C11.2 C12.2 IC1.5 IC1.11 IC2.2 J1.2 J2.1 J3.1 pad.M R2.1 R5.1 R6.1 R7.2 | length 105.9
  Top Layer w0.25: C3.2@4.5,20.45 5.95,20.45 8,22.5 9.96,22.5 10.375,22.085 10.375,22.025 10.75,21.65 R2.1 ; J1.2 6.583,14.905 7.503,15.825 10.325,15.825 IC1.11 12.95,16.5 14,17.55 C4.1 ; R5.1 IC1.11@10.275,16.925 ; IC1.5 10,17.2 IC1.11@10.275,16.925 ; IC1.11@10.35,16.85 IC1.11@10.275,16.925 ; IC2.2 27.7,2.65 28.15,2.65 28.5,3 28.5,3.835 28.19,4.145 C11.2 C12.2 29.31,5.81 29.905,6.405 J3.1 35.009,6.405 35.7,7.096 35.7,18.55 34.44,19.81 J2.1
  Top Layer w0.5: v1(3.031,6.523) 0.55,9.003 0.55,29.5 1.75,30.7 13.25,30.7 16.35,27.6 C10.2
  Top Layer w1: C10.2 16,25.4 16,18.086 15.614,17.7 14.4,17.7 C4.1 C8.1 C9.1
  other v1: 28.75,1.25 37.5,1.25 14.75,1.75 16,1.75 4.5,2 3.031,2.477 5.969,2.477 28.75,2.5 22.5,3 24,3 25.5,3 37.5,3.25 2.122,3.727 6.878,3.727 28.75,3.75 20.5,4 2.122,5.273 6.878,5.273 21,5.5 37.5,5.5 10.5,5.75 28.5,6.25 30,6.25 5.969,6.523 4.5,7 10.5,7 20.5,7 37.5,7.5 28.5,7.75 30,7.75 10.5,8.25 21,8.5 10.5,9.5 31.5,9.5 32.5,9.5 20.5,10 10.5,10.75 21,11.5 20.5,13 4,13.25 4,14.5 16,15.25 17.25,15.25 18.5,15.25 19.75,15.25 21,15.25 4,15.75 12.75,16.5 16,16.5 4,17 6.75,18.25 6.75,19.5 6.75,20.75 27,21.75 6.75,22 15.5,24 16.75,24 18,24 19.25,24 34.25,24.25 32.781,24.727 35.719,24.727 1.25,25.5 31.872,25.977 36.628,25.977 1.25,27 19.75,27.25 27,27.25 31.872,27.523 36.628,27.523 1.25,28.5 15,28.75 32.781,28.773 35.719,28.773 21.75,29 25,29 34.25,29.25 1.25,30 15,30.25
  other v2: 10.5,22.5
NetC5_1: C5.1 IC1.9 | length 1.8
  Top Layer w0.25: IC1.9 11.5,14.675 12.125,14.05 12.125,14 12.45,13.675 C5.1
NetC5_2: C5.2 IC1.10 L2.1
NetC6_1: C6.1 IC1.8 | length 3.1
  Top Layer w0.25: IC1.8 11,14.539 11.575,13.964 11.575,13.325 11.25,13 C6.1
NetC7_1: C7.1 IC1.6 R4.1 R6.2 | length 4
  Top Layer w0.25: R6.2@8.5,14.674 8.675,14.499 9.649,14.499 ; R4.1 9.72,12.53 9.72,13.47 C7.1 9.649,13.541 9.649,14.499 ; IC1.6 10,14.85 9.649,14.499
NetD1_2: D1.2 R7.1 | length 1.1
  Top Layer w0.25: R7.1 D1.2
NetIC1_2: IC1.2 R1.1 R2.2 | length 3.8
  Top Layer w0.25: R1.1 R2.2 10.75,19.75 11.5,19 IC1.2
NetIC1_3: IC1.3 R5.2 | length 5
  Top Layer w0.25: R5.2 8.5,18.916 9.304,19.72 10.144,19.72 11,18.864 IC1.3
VFILT: C3.1 C4.2 IC1.1 L1.2 R1.2 | length 4.5
  Top Layer w0.25: v1(8.75,21.5) 9.675,21.5 R1.2
  Bottom Layer w0.25: v1(8.75,21.5) v1(12.25,21.5)
VIN: C1.2 C2.2 J1.1 L1.1 | length 23.3
  Top Layer w2: J1.1 6.254,11.143 3.172,11.143 2,12.314 2,23.078 3.172,24.25 6.25,24.25 7.5,25.5 8.75,25.5
pads on no net: IC2.4

## Polygon pours and split planes (outlines as drawn)
GND on Bottom Layer "NONET_L-01_P-001" (solid, remove dead copper, pour order 26): 0,0 0,31.5 40,31.5 40,0
GND on Top Layer "GND_L01_P032" (solid, remove dead copper, pour order 32): 0,31.25 0,0 38.75,0 38.75,31.25
VIN on Top Layer "VIN_L01_P031" (solid, pour order 31): 9.75,6.25 9.75,10.75 8.25,10.75 7.75,11.25 7.75,12 7,12.75 5.5,12.75 4.75,12 4.75,10.25 5.5,9.5 6.75,9.5 7.5,8.75 7.5,7 8.25,6.25
4V on Top Layer "4V_L01_P030" (solid, pour order 30): 22.5,5 23.5,4 26,4 27,3 28,3 28,4 27.75,4.25 27.75,8.25 28.25,8.75 29.5,8.75 29.5,10 30,10.5 33.5,10.5 34.25,11.25 34.25,13.5 33.5,14.25 31,14.25 30.25,15 30.25,17.25 26.25,21.25 26.25,27 25,28.25 21.75,28.25 20.5,27 20.5,23 19,21.5 16.75,21.5 16.75,19 21.25,19 22.5,17.75
NetC5_2 on Top Layer "NETC5_2_L01_P029" (solid, pour order 29): 11.75,15.5 11.75,14.75 12.25,14.25 13.25,14.25 13.25,13.25 13,13 11.75,13 11.75,11.5 12.5,10.75 12.5,5 13.5,4 17.75,4 18.75,5 18.75,12.5 17.5,13.75 16.25,13.75 14.5,15.5
VFILT on Top Layer "VFILT_L01_P028" (solid, pour order 28): 3,30.5 2.5,30 2.5,26 3,25.5 5.75,25.5 8.25,28 11,28 11,23.25 11.25,23 11.25,19.75 11.75,19.25 11.75,17.5 12.5,17.5 13,18 13,18.5 13.5,19 15.25,19 15.25,23 14,24.25 14,29.5 13,30.5
VIN on Top Layer "VIN_L01_P027" (solid, remove dead copper, pour order 27): 10.75,27.75 8.5,27.75 7,26.25 7,24.75 8.5,23.25 10.75,23.25

## Keep-outs
Keep-Out Layer:
  the board outline again, w0.2

## Silkscreen, mask and mechanical layers (free items; w line width, h text height)
Bottom Overlay:
  text "Converts" at 31.224,26.817 h4
  text "(48V)" at 33.087,19.769 h9 r359.82
  text "GND" at 38.452,18.964 h2.75
  text "into" at 30.217,15.417 h4 r350
  text "PGD" at 38.179,15.154 h2.75
  text "GND" at 4.802,14.059 h2.75
  text "4V" at 36.722,11.352 h2.75
  text "VIN" at 4.802,10.26 h2.75
  text "and" at 29.137,9.398 h2.5 r350
  text "GND" at 38.452,5.559 h2.75
  text "4.0 / 3.3" at 26.133,4.578 h8
  text "volts" at 9.868,4.007 h4.7 r270
  text "3V3" at 37.845,1.745 h2.75
  text "like magic" at 30.387,-0.876 h4